# Altium PCB PCB_RB2_My — копия.PcbDoc (part 2 of 3)
Units mm, origin at the board's own origin, x right, y up, seen from the top; angles counter-clockwise.
Board outline 198 x 170 mm, 2 copper layers (Top, Bottom); 107 components, 89 nets, 429 pads, 3906 vias.
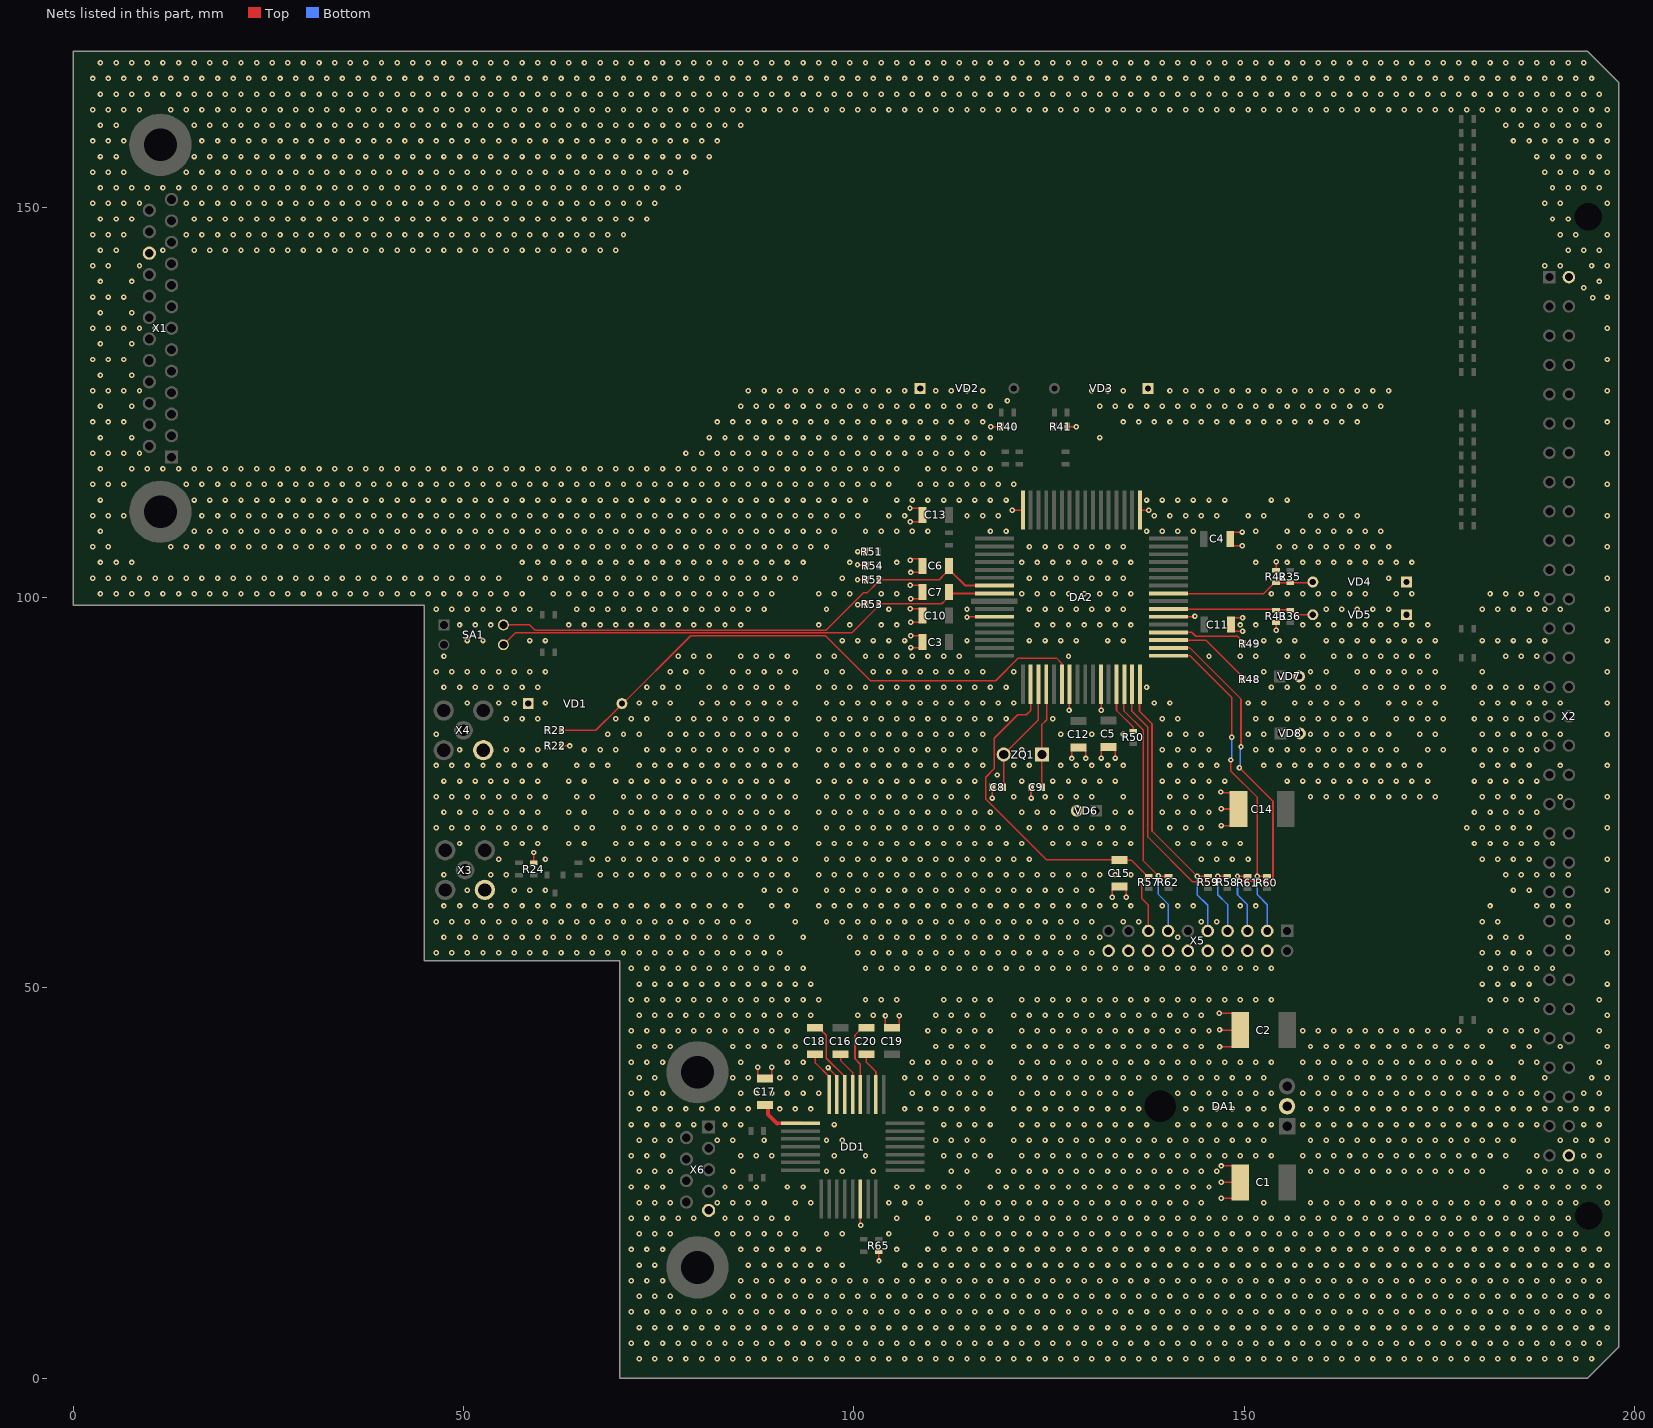
[diagram p2: the nets of this part, all layers, seen from the top]

## Via types
v1: diameter 0.7, hole 0.3, Top to Bottom, tented both sides, 3906 vias

## Nets (pads, with @x,y where several pads share a name; then routed paths per layer and width w, separated by ;. In a path a pad name is that pad's centre, name@x,y a point inside that pad or via, vN(x,y) a via of type N, cw(c..) or ccw(c..) an arc to the next point about the centre after c; other vN are vias at no path point) (continued)
GND: C1.2 C2.2 C3.2 C4.2 C5.2 C6.1 C7.1 C8.2 C9.2 C10.2 C11.2 C12.2 C13.2 C14.2 C15.2 C17.1 C19.1 DA1.2 DA2.3 DA2.15 DA2.19 DA2.30 DA2.41 DA2.56 DD1.2 DD1.15 R22.1 R24.1 R40.2 R41.2 R42.2 R43.2 R51.1 R52.1 R53.1 R54.2 R65.1 VD1.1 VD2.1 VD3.1 VD4.1 VD5.1 VD6.2 VD7.2 VD8.2 X1.23 X2.1B X2.31B X3.2 X4.2 X5.4 X5.6 X5.8 X5.10 X5.12 X5.14 X5.16 X5.18 X5.20 X6.5 | length 121.2
  Top w0.2: R24.1@59,66.025 v1(59,67.35) ; R22.1@62.525,81 v1(63.625,81) ; v1(87.7,39.825) 87.7,38.737 88.138,38.3 89.038,38.3 89.475,38.737 v1(89.475,39.85) ; v1(96.7,39.8) 96.7,39.765 97.84,38.625 DD1.2@97.84,36.35 ; v1(100.475,102.3) R52.1@101.6,102.3 ; v1(100.475,104.2) 100.494,104.181 101.281,104.181 101.3,104.2 ; v1(100.5,105.9) R51.1@101.5,105.9 ; v1(100.507,99.093) 101.518,99.093 R53.1@101.575,99.15 ; DD1.15@100.84,22.97 100.84,19.66 v1(100.9,19.6) ; R65.1@103.2,16.2 103.2,15.05 v1(103.225,15.025) ; v1(104.05,46.425) 104.05,45.337 104.487,44.9 C19.1@104.9,44.9 105.388,44.9 105.825,45.337 v1(105.825,46.45) ; v1(107.2,111.45) 108.35,111.45 108.75,111.05 108.75,110.125 108.35,109.725 v1(107.225,109.725) ; v1(107.25,98.575) 108.4,98.575 108.8,98.175 C10.2@108.8,97.7 108.8,97.25 108.4,96.85 v1(107.275,96.85) ; v1(107.25,101.575) 108.4,101.575 108.8,101.175 108.8,100.25 108.4,99.85 v1(107.275,99.85) ; v1(107.25,104.775) 107.288,104.775 107.463,104.95 108.4,104.95 108.8,104.55 108.8,103.625 108.4,103.225 v1(107.275,103.225) ; v1(107.3,93.6) 108.4,93.6 108.8,94 C3.2@108.8,94.3 ; v1(107.3,95.125) 108.4,95.125 108.792,94.733 C3.2@108.792,94.308 ; v1(114.5,97.5) 114.55,97.55 DA2.3@118,97.55 ; v1(117.525,121.9) R40.2@118.875,121.9 ; v1(117.719,74.328) C8.2@117.719,75.703 ; v1(120.3,111.2) DA2.56@121.65,111.2 ; C9.2@122.7,75.7 122.7,74.35 v1(122.725,74.325) ; R41.2@127.186,121.9 v1(128.5,121.9) ; v1(127.575,85.575) 127.6,85.6 DA2.15@127.6,88.9 ; v1(127.925,79.4) 127.925,80.4 128.325,80.8 129.3,80.8 129.7,80.4 v1(129.7,79.4) ; v1(131.675,85.55) DA2.19@131.675,88.825 ; v1(131.7,79.45) 131.7,80.45 132.1,80.85 C5.2@132.6,80.85 133.075,80.85 133.475,80.45 v1(133.475,79.45) ; v1(133.125,61.6) 133.125,62.6 133.525,63 134.5,63 134.9,62.6 v1(134.9,61.6) ; DA2.41@136.65,111.2 v1(137.8,111.2) ; DA2.30@140.3,97.55 143.65,97.55 v1(143.7,97.6) ; v1(146.825,46.775) 146.85,46.75 148.45,46.75 149.475,45.725 C2.2@149.475,44.6 ; v1(146.85,42.475) 148.45,42.475 149.475,43.5 C2.2@149.475,44.6 ; v1(146.85,44.625) 146.875,44.6 C2.2@149.475,44.6 ; v1(147.025,75.1) 147.16,75.1 147.26,75 148.25,75 149.675,73.575 C14.2@149.675,72.925 ; v1(147.05,70.8) 148.65,70.8 149.675,71.825 C14.2@149.675,72.925 ; v1(147.05,72.95) 147.075,72.925 C14.2@149.675,72.925 ; v1(147.075,23.05) 148.6,23.05 149.475,23.925 C1.2@149.475,25.1 ; v1(147.075,25.125) 147.1,25.1 C1.2@149.475,25.1 ; v1(147.075,27.2) 148.45,27.2 149.475,26.175 C1.2@149.475,25.1 ; C11.2@148.225,96.55 148.225,96.1 148.625,95.7 149.775,95.7 v1(149.8,95.675) ; C11.2@148.225,97.15 148.5,97.425 v1(149.8,97.425) ; v1(149.75,106.65) 148.625,106.65 148.225,107.05 C4.2@148.225,107.525 148.225,108 148.625,108.4 v1(149.75,108.4) ; v1(154.1,95.8) R43.2@154.1,96.8 ; R42.2@154.1,103.5 v1(154.1,104.6)
  other v1: 72.5,2.5 74.5,2.5 76.5,2.5 78.5,2.5 80.5,2.5 82.5,2.5 84.5,2.5 86.5,2.5 88.5,2.5 90.5,2.5 92.5,2.5 94.5,2.5 96.5,2.5 98.5,2.5 100.5,2.5 102.5,2.5 104.5,2.5 106.5,2.5 108.5,2.5 110.5,2.5 112.5,2.5 114.5,2.5 116.5,2.5 118.5,2.5 120.5,2.5 122.5,2.5 124.5,2.5 126.5,2.5 128.5,2.5 130.5,2.5 132.5,2.5 134.5,2.5 136.5,2.5 138.5,2.5 140.5,2.5 142.5,2.5 144.5,2.5 146.5,2.5 148.5,2.5 150.5,2.5 152.5,2.5 154.5,2.5 156.5,2.5 158.5,2.5 160.5,2.5 162.5,2.5 164.5,2.5 166.5,2.5 168.5,2.5 170.5,2.5 172.5,2.5 174.5,2.5 176.5,2.5 178.5,2.5 180.5,2.5 182.5,2.5 184.5,2.5 186.5,2.5 188.5,2.5 190.5,2.5 192.5,2.5 194.5,2.5 71.5,4.5 73.5,4.5 75.5,4.5 77.5,4.5 79.5,4.5 81.5,4.5 83.5,4.5 85.5,4.5 87.5,4.5 89.5,4.5 91.5,4.5 93.5,4.5 95.5,4.5 97.5,4.5 99.5,4.5 101.5,4.5 103.5,4.5 105.5,4.5 107.5,4.5 109.5,4.5 111.5,4.5 113.5,4.5 115.5,4.5 117.5,4.5 119.5,4.5 121.5,4.5 123.5,4.5 125.5,4.5 127.5,4.5 129.5,4.5 131.5,4.5 133.5,4.5 135.5,4.5 137.5,4.5 139.5,4.5 141.5,4.5 143.5,4.5 145.5,4.5 147.5,4.5 149.5,4.5 151.5,4.5 153.5,4.5 155.5,4.5 157.5,4.5 159.5,4.5 161.5,4.5 163.5,4.5 165.5,4.5 167.5,4.5 169.5,4.5 171.5,4.5 173.5,4.5 175.5,4.5 177.5,4.5 179.5,4.5 181.5,4.5 183.5,4.5 185.5,4.5 187.5,4.5 189.5,4.5 191.5,4.5 193.5,4.5 195.5,4.5 72.5,6.5 74.5,6.5 76.5,6.5 78.5,6.5 80.5,6.5 82.5,6.5 84.5,6.5 86.5,6.5 88.5,6.5 90.5,6.5 92.5,6.5 94.5,6.5 96.5,6.5 98.5,6.5 100.5,6.5 102.5,6.5 104.5,6.5 106.5,6.5 108.5,6.5 110.5,6.5 112.5,6.5 114.5,6.5 116.5,6.5 118.5,6.5 120.5,6.5 122.5,6.5 124.5,6.5 126.5,6.5 128.5,6.5 130.5,6.5 132.5,6.5 134.5,6.5 136.5,6.5 138.5,6.5 140.5,6.5 142.5,6.5 144.5,6.5 146.5,6.5 148.5,6.5 150.5,6.5 152.5,6.5 154.5,6.5 156.5,6.5 158.5,6.5 160.5,6.5 162.5,6.5 164.5,6.5 166.5,6.5 168.5,6.5 170.5,6.5 172.5,6.5 174.5,6.5 176.5,6.5 178.5,6.5 180.5,6.5 182.5,6.5 184.5,6.5 186.5,6.5 188.5,6.5 190.5,6.5 192.5,6.5 194.5,6.5 196.5,6.5 71.5,8.5 73.5,8.5 75.5,8.5 77.5,8.5 79.5,8.5 81.5,8.5 83.5,8.5 85.5,8.5 87.5,8.5 89.5,8.5 91.5,8.5 93.5,8.5 95.5,8.5 97.5,8.5 99.5,8.5 101.5,8.5 103.5,8.5 105.5,8.5 107.5,8.5 109.5,8.5 111.5,8.5 113.5,8.5 115.5,8.5 117.5,8.5 119.5,8.5 121.5,8.5 123.5,8.5 125.5,8.5 127.5,8.5 129.5,8.5 131.5,8.5 133.5,8.5 135.5,8.5 137.5,8.5 139.5,8.5 141.5,8.5 143.5,8.5 145.5,8.5 147.5,8.5 149.5,8.5 151.5,8.5 153.5,8.5 155.5,8.5 157.5,8.5 159.5,8.5 161.5,8.5 163.5,8.5 165.5,8.5 167.5,8.5 169.5,8.5 171.5,8.5 173.5,8.5 175.5,8.5 177.5,8.5 179.5,8.5 181.5,8.5 183.5,8.5 185.5,8.5 187.5,8.5 189.5,8.5 191.5,8.5 193.5,8.5 195.5,8.5 72.5,10.5 74.5,10.5 76.5,10.5 84.5,10.5 86.5,10.5 88.5,10.5 90.5,10.5 92.5,10.5 94.5,10.5 96.5,10.5 98.5,10.5 100.5,10.5 102.5,10.5 104.5,10.5 106.5,10.5 108.5,10.5 110.5,10.5 112.5,10.5 114.5,10.5 116.5,10.5 118.5,10.5 120.5,10.5 122.5,10.5 124.5,10.5 126.5,10.5 128.5,10.5 130.5,10.5 132.5,10.5 134.5,10.5 136.5,10.5 138.5,10.5 140.5,10.5 142.5,10.5 144.5,10.5 146.5,10.5 148.5,10.5 150.5,10.5 152.5,10.5 154.5,10.5 156.5,10.5 158.5,10.5 160.5,10.5 162.5,10.5 164.5,10.5 166.5,10.5 168.5,10.5 170.5,10.5 172.5,10.5 174.5,10.5 176.5,10.5 178.5,10.5 180.5,10.5 182.5,10.5 184.5,10.5 186.5,10.5 188.5,10.5 190.5,10.5 192.5,10.5 194.5,10.5 196.5,10.5 71.5,12.5 73.5,12.5 75.5,12.5 85.5,12.5 87.5,12.5 89.5,12.5 91.5,12.5 93.5,12.5 95.5,12.5 97.5,12.5 99.5,12.5 101.5,12.5 103.5,12.5 105.5,12.5 107.5,12.5 109.5,12.5 111.5,12.5 113.5,12.5 115.5,12.5 117.5,12.5 119.5,12.5 121.5,12.5 123.5,12.5 125.5,12.5 127.5,12.5 129.5,12.5 131.5,12.5 133.5,12.5 135.5,12.5 137.5,12.5 139.5,12.5 141.5,12.5 143.5,12.5 145.5,12.5 147.5,12.5 149.5,12.5 151.5,12.5 153.5,12.5 155.5,12.5 157.5,12.5 159.5,12.5 161.5,12.5 163.5,12.5 165.5,12.5 167.5,12.5 169.5,12.5 171.5,12.5 173.5,12.5 175.5,12.5 177.5,12.5 179.5,12.5 181.5,12.5 183.5,12.5 185.5,12.5 187.5,12.5 189.5,12.5 191.5,12.5 193.5,12.5 195.5,12.5 72.5,14.5 74.5,14.5 86.5,14.5 88.5,14.5 90.5,14.5 92.5,14.5 94.5,14.5 96.5,14.5 98.5,14.5 106.5,14.5 108.5,14.5 110.5,14.5 112.5,14.5 114.5,14.5 116.5,14.5 118.5,14.5 120.5,14.5 122.5,14.5 124.5,14.5 126.5,14.5 128.5,14.5 130.5,14.5 132.5,14.5 134.5,14.5 136.5,14.5 138.5,14.5 140.5,14.5 142.5,14.5 144.5,14.5 146.5,14.5 148.5,14.5 150.5,14.5 152.5,14.5 154.5,14.5 156.5,14.5 158.5,14.5 160.5,14.5 162.5,14.5 164.5,14.5 166.5,14.5 168.5,14.5 170.5,14.5 172.5,14.5 174.5,14.5 176.5,14.5 178.5,14.5 180.5,14.5 182.5,14.5 184.5,14.5 186.5,14.5 188.5,14.5 190.5,14.5 192.5,14.5 194.5,14.5 196.5,14.5 71.5,16.5 73.5,16.5 75.5,16.5 85.5,16.5 87.5,16.5 89.5,16.5 91.5,16.5 93.5,16.5 95.5,16.5 105.5,16.5 109.5,16.5 111.5,16.5 113.5,16.5 115.5,16.5 117.5,16.5 119.5,16.5 121.5,16.5 123.5,16.5 125.5,16.5 127.5,16.5 129.5,16.5 131.5,16.5 133.5,16.5 135.5,16.5 137.5,16.5 139.5,16.5 141.5,16.5 143.5,16.5 145.5,16.5 147.5,16.5 149.5,16.5 151.5,16.5 153.5,16.5 155.5,16.5 157.5,16.5 159.5,16.5 161.5,16.5 163.5,16.5 165.5,16.5 167.5,16.5 169.5,16.5 171.5,16.5 173.5,16.5 175.5,16.5 177.5,16.5 179.5,16.5 181.5,16.5 183.5,16.5 185.5,16.5 187.5,16.5 189.5,16.5 191.5,16.5 193.5,16.5 195.5,16.5 72.5,18.5 74.5,18.5 76.5,18.5 82.5,18.5 84.5,18.5 86.5,18.5 88.5,18.5 90.5,18.5 92.5,18.5 96.5,18.5 98.5,18.5 104.5,18.5 110.5,18.5 112.5,18.5 114.5,18.5 116.5,18.5 118.5,18.5 120.5,18.5 122.5,18.5 124.5,18.5 126.5,18.5 128.5,18.5 130.5,18.5 132.5,18.5 134.5,18.5 136.5,18.5 138.5,18.5 140.5,18.5 142.5,18.5 144.5,18.5 146.5,18.5 148.5,18.5 150.5,18.5 152.5,18.5 154.5,18.5 156.5,18.5 158.5,18.5 160.5,18.5 162.5,18.5 164.5,18.5 166.5,18.5 168.5,18.5 170.5,18.5 172.5,18.5 174.5,18.5 176.5,18.5 178.5,18.5 180.5,18.5 182.5,18.5 184.5,18.5 186.5,18.5 188.5,18.5 190.5,18.5 192.5,18.5 196.5,18.5 71.5,20.5 73.5,20.5 75.5,20.5 77.5,20.5 79.5,20.5 83.5,20.5 85.5,20.5 87.5,20.5 89.5,20.5 91.5,20.5 105.5,20.5 109.5,20.5 113.5,20.5 115.5,20.5 117.5,20.5 119.5,20.5 121.5,20.5 123.5,20.5 125.5,20.5 127.5,20.5 129.5,20.5 131.5,20.5 133.5,20.5 135.5,20.5 137.5,20.5 139.5,20.5 141.5,20.5 143.5,20.5 145.5,20.5 147.5,20.5 149.5,20.5 151.5,20.5 153.5,20.5 155.5,20.5 157.5,20.5 159.5,20.5 161.5,20.5 163.5,20.5 165.5,20.5 167.5,20.5 169.5,20.5 171.5,20.5 173.5,20.5 175.5,20.5 177.5,20.5 179.5,20.5 181.5,20.5 183.5,20.5 185.5,20.5 187.5,20.5 189.5,20.5 191.5,20.5 72.5,22.5 74.5,22.5 76.5,22.5 82.5,22.5 84.5,22.5 86.5,22.5 88.5,22.5 92.5,22.5 94.5,22.5 104.5,22.5 106.5,22.5 108.5,22.5 114.5,22.5 116.5,22.5 118.5,22.5 120.5,22.5 122.5,22.5 124.5,22.5 126.5,22.5 128.5,22.5 130.5,22.5 132.5,22.5 134.5,22.5 136.5,22.5 138.5,22.5 140.5,22.5 142.5,22.5 144.5,22.5 152.5,22.5 158.5,22.5 160.5,22.5 162.5,22.5 164.5,22.5 166.5,22.5 168.5,22.5 170.5,22.5 172.5,22.5 174.5,22.5 176.5,22.5 178.5,22.5 180.5,22.5 182.5,22.5 184.5,22.5 186.5,22.5 188.5,22.5 190.5,22.5 192.5,22.5 196.5,22.5 71.5,24.5 73.5,24.5 75.5,24.5 83.5,24.5 85.5,24.5 87.5,24.5 91.5,24.5 93.5,24.5 105.5,24.5 107.5,24.5 109.5,24.5 111.5,24.5 113.5,24.5 117.5,24.5 119.5,24.5 121.5,24.5 123.5,24.5 125.5,24.5 127.5,24.5 129.5,24.5 131.5,24.5 133.5,24.5 135.5,24.5 137.5,24.5 139.5,24.5 141.5,24.5 143.5,24.5 145.5,24.5 183.5,24.5 185.5,24.5 187.5,24.5 189.5,24.5 191.5,24.5 193.5,24.5 195.5,24.5 72.5,26.5 74.5,26.5 76.5,26.5 84.5,26.5 96.5,26.5 98.5,26.5 102.5,26.5 112.5,26.5 114.5,26.5 118.5,26.5 120.5,26.5 122.5,26.5 124.5,26.5 126.5,26.5 128.5,26.5 130.5,26.5 132.5,26.5 134.5,26.5 136.5,26.5 138.5,26.5 140.5,26.5 142.5,26.5 144.5,26.5 146.5,26.5 158.5,26.5 160.5,26.5 162.5,26.5 164.5,26.5 166.5,26.5 168.5,26.5 170.5,26.5 172.5,26.5 174.5,26.5 176.5,26.5 178.5,26.5 180.5,26.5 186.5,26.5 188.5,26.5 190.5,26.5 192.5,26.5 194.5,26.5 196.5,26.5 71.5,28.5 73.5,28.5 75.5,28.5 85.5,28.5 87.5,28.5 89.5,28.5 97.5,28.5 101.5,28.5 111.5,28.5 113.5,28.5 115.5,28.5 117.5,28.5 121.5,28.5 123.5,28.5 125.5,28.5 127.5,28.5 129.5,28.5 131.5,28.5 133.5,28.5 135.5,28.5 137.5,28.5 139.5,28.5 141.5,28.5 143.5,28.5 145.5,28.5 147.5,28.5 149.5,28.5 151.5,28.5 153.5,28.5 157.5,28.5 159.5,28.5 161.5,28.5 163.5,28.5 165.5,28.5 167.5,28.5 169.5,28.5 171.5,28.5 173.5,28.5 175.5,28.5 177.5,28.5 179.5,28.5 181.5,28.5 183.5,28.5 187.5,28.5 193.5,28.5 195.5,28.5 72.5,30.5 74.5,30.5 76.5,30.5 82.5,30.5 84.5,30.5 88.5,30.5 96.5,30.5 98.5,30.5 110.5,30.5 112.5,30.5 114.5,30.5 116.5,30.5 120.5,30.5 122.5,30.5 124.5,30.5 126.5,30.5 128.5,30.5 130.5,30.5 132.5,30.5 134.5,30.5 136.5,30.5 138.5,30.5 140.5,30.5 142.5,30.5 144.5,30.5 146.5,30.5 148.5,30.5 150.5,30.5 152.5,30.5 158.5,30.5 160.5,30.5 162.5,30.5 164.5,30.5 166.5,30.5 168.5,30.5 170.5,30.5 172.5,30.5 174.5,30.5 176.5,30.5 178.5,30.5 180.5,30.5 182.5,30.5 184.5,30.5 190.5,30.5 192.5,30.5 194.5,30.5 196.5,30.5 71.5,32.5 73.5,32.5 75.5,32.5 77.5,32.5 79.5,32.5 83.5,32.5 85.5,32.5 97.5,32.5 111.5,32.5 113.5,32.5 115.5,32.5 117.5,32.5 121.5,32.5 123.5,32.5 125.5,32.5 127.5,32.5 129.5,32.5 131.5,32.5 133.5,32.5 135.5,32.5 137.5,32.5 141.5,32.5 143.5,32.5 145.5,32.5 147.5,32.5 149.5,32.5 151.5,32.5 153.5,32.5 157.5,32.5 159.5,32.5 161.5,32.5 163.5,32.5 165.5,32.5 167.5,32.5 169.5,32.5 171.5,32.5 173.5,32.5 175.5,32.5 177.5,32.5 179.5,32.5 181.5,32.5 183.5,32.5 185.5,32.5 187.5,32.5 193.5,32.5 195.5,32.5 72.5,34.5 74.5,34.5 76.5,34.5 78.5,34.5 80.5,34.5 82.5,34.5 84.5,34.5 86.5,34.5 90.5,34.5 92.5,34.5 94.5,34.5 106.5,34.5 108.5,34.5 110.5,34.5 112.5,34.5 114.5,34.5 116.5,34.5 120.5,34.5 122.5,34.5 124.5,34.5 126.5,34.5 128.5,34.5 130.5,34.5 132.5,34.5 134.5,34.5 136.5,34.5 142.5,34.5 144.5,34.5 146.5,34.5 148.5,34.5 150.5,34.5 152.5,34.5 158.5,34.5 160.5,34.5 162.5,34.5 164.5,34.5 166.5,34.5 168.5,34.5 170.5,34.5 172.5,34.5 174.5,34.5 176.5,34.5 178.5,34.5 180.5,34.5 182.5,34.5 184.5,34.5 186.5,34.5 188.5,34.5 190.5,34.5 192.5,34.5 194.5,34.5 196.5,34.5 71.5,36.5 73.5,36.5 75.5,36.5 85.5,36.5 87.5,36.5 89.5,36.5 91.5,36.5 93.5,36.5 95.5,36.5 107.5,36.5 109.5,36.5 111.5,36.5 113.5,36.5 115.5,36.5 117.5,36.5 121.5,36.5 123.5,36.5 125.5,36.5 127.5,36.5 129.5,36.5 131.5,36.5 133.5,36.5 135.5,36.5 141.5,36.5 143.5,36.5 145.5,36.5 147.5,36.5 149.5,36.5 151.5,36.5 153.5,36.5 157.5,36.5 159.5,36.5 161.5,36.5 163.5,36.5 165.5,36.5 167.5,36.5 169.5,36.5 171.5,36.5 173.5,36.5 175.5,36.5 177.5,36.5 179.5,36.5 181.5,36.5 183.5,36.5 185.5,36.5 187.5,36.5 193.5,36.5 195.5,36.5 72.5,38.5 74.5,38.5 84.5,38.5 86.5,38.5 90.5,38.5 92.5,38.5 94.5,38.5 106.5,38.5 108.5,38.5 110.5,38.5 112.5,38.5 114.5,38.5 116.5,38.5 120.5,38.5 122.5,38.5 124.5,38.5 126.5,38.5 128.5,38.5 130.5,38.5 132.5,38.5 134.5,38.5 136.5,38.5 138.5,38.5 140.5,38.5 142.5,38.5 144.5,38.5 146.5,38.5 148.5,38.5 150.5,38.5 152.5,38.5 158.5,38.5 160.5,38.5 162.5,38.5 164.5,38.5 166.5,38.5 168.5,38.5 170.5,38.5 172.5,38.5 174.5,38.5 176.5,38.5 178.5,38.5 180.5,38.5 182.5,38.5 184.5,38.5 188.5,38.5 194.5,38.5 196.5,38.5 71.5,40.5 73.5,40.5 75.5,40.5 85.5,40.5 91.5,40.5 93.5,40.5 107.5,40.5 109.5,40.5 111.5,40.5 113.5,40.5 115.5,40.5 117.5,40.5 121.5,40.5 123.5,40.5 125.5,40.5 127.5,40.5 129.5,40.5 131.5,40.5 133.5,40.5 135.5,40.5 137.5,40.5 139.5,40.5 141.5,40.5 143.5,40.5 145.5,40.5 147.5,40.5 149.5,40.5 151.5,40.5 153.5,40.5 157.5,40.5 159.5,40.5 161.5,40.5 163.5,40.5 165.5,40.5 167.5,40.5 169.5,40.5 171.5,40.5 173.5,40.5 175.5,40.5 177.5,40.5 179.5,40.5 181.5,40.5 185.5,40.5 187.5,40.5 195.5,40.5 72.5,42.5 74.5,42.5 76.5,42.5 84.5,42.5 86.5,42.5 88.5,42.5 90.5,42.5 92.5,42.5 110.5,42.5 112.5,42.5 114.5,42.5 116.5,42.5 120.5,42.5 122.5,42.5 124.5,42.5 126.5,42.5 128.5,42.5 130.5,42.5 132.5,42.5 134.5,42.5 136.5,42.5 138.5,42.5 140.5,42.5 142.5,42.5 144.5,42.5 158.5,42.5 160.5,42.5 162.5,42.5 164.5,42.5 166.5,42.5 168.5,42.5 170.5,42.5 172.5,42.5 174.5,42.5 176.5,42.5 178.5,42.5 180.5,42.5 184.5,42.5 186.5,42.5 190.5,42.5 196.5,42.5 71.5,44.5 73.5,44.5 75.5,44.5 77.5,44.5 79.5,44.5 81.5,44.5 83.5,44.5 85.5,44.5 87.5,44.5 89.5,44.5 91.5,44.5 109.5,44.5 111.5,44.5 113.5,44.5 115.5,44.5 117.5,44.5 121.5,44.5 123.5,44.5 125.5,44.5 127.5,44.5 129.5,44.5 131.5,44.5 133.5,44.5 135.5,44.5 137.5,44.5 139.5,44.5 141.5,44.5 143.5,44.5 145.5,44.5 157.5,44.5 159.5,44.5 161.5,44.5 163.5,44.5 165.5,44.5 167.5,44.5 169.5,44.5 171.5,44.5 173.5,44.5 175.5,44.5 177.5,44.5 181.5,44.5 183.5,44.5 185.5,44.5 187.5,44.5 195.5,44.5 72.5,46.5 74.5,46.5 76.5,46.5 78.5,46.5 80.5,46.5 82.5,46.5 84.5,46.5 86.5,46.5 88.5,46.5 90.5,46.5 92.5,46.5 94.5,46.5 100.5,46.5 102.5,46.5 110.5,46.5 112.5,46.5 114.5,46.5 116.5,46.5 120.5,46.5 122.5,46.5 124.5,46.5 126.5,46.5 128.5,46.5 130.5,46.5 132.5,46.5 134.5,46.5 136.5,46.5 138.5,46.5 140.5,46.5 142.5,46.5 144.5,46.5 196.5,46.5 71.5,48.5 73.5,48.5 75.5,48.5 77.5,48.5 79.5,48.5 81.5,48.5 83.5,48.5 85.5,48.5 87.5,48.5 89.5,48.5 91.5,48.5 93.5,48.5 95.5,48.5 101.5,48.5 103.5,48.5 105.5,48.5 111.5,48.5 113.5,48.5 115.5,48.5 117.5,48.5 121.5,48.5 123.5,48.5 125.5,48.5 127.5,48.5 129.5,48.5 131.5,48.5 133.5,48.5 135.5,48.5 137.5,48.5 139.5,48.5 141.5,48.5 143.5,48.5 145.5,48.5 147.5,48.5 149.5,48.5 151.5,48.5 153.5,48.5 181.5,48.5 183.5,48.5 185.5,48.5 187.5,48.5 195.5,48.5 72.5,50.5 74.5,50.5 76.5,50.5 78.5,50.5 80.5,50.5 82.5,50.5 84.5,50.5 86.5,50.5 88.5,50.5 90.5,50.5 92.5,50.5 94.5,50.5 180.5,50.5 182.5,50.5 184.5,50.5 186.5,50.5 196.5,50.5 71.5,52.5 73.5,52.5 75.5,52.5 77.5,52.5 79.5,52.5 81.5,52.5 83.5,52.5 85.5,52.5 87.5,52.5 89.5,52.5 91.5,52.5 93.5,52.5 101.5,52.5 103.5,52.5 105.5,52.5 107.5,52.5 109.5,52.5 111.5,52.5 113.5,52.5 115.5,52.5 117.5,52.5 119.5,52.5 121.5,52.5 123.5,52.5 125.5,52.5 127.5,52.5 129.5,52.5 131.5,52.5 133.5,52.5 135.5,52.5 137.5,52.5 139.5,52.5 141.5,52.5 143.5,52.5 145.5,52.5 147.5,52.5 149.5,52.5 151.5,52.5 153.5,52.5 181.5,52.5 183.5,52.5 185.5,52.5 187.5,52.5 189.5,52.5 46.5,54.5 48.5,54.5 50.5,54.5 52.5,54.5 54.5,54.5 56.5,54.5 58.5,54.5 60.5,54.5 62.5,54.5 64.5,54.5 66.5,54.5 68.5,54.5 70.5,54.5 72.5,54.5 74.5,54.5 76.5,54.5 78.5,54.5 80.5,54.5 82.5,54.5 84.5,54.5 86.5,54.5 88.5,54.5 90.5,54.5 100.5,54.5 102.5,54.5 104.5,54.5 106.5,54.5 108.5,54.5 110.5,54.5 112.5,54.5 114.5,54.5 116.5,54.5 118.5,54.5 120.5,54.5 122.5,54.5 124.5,54.5 126.5,54.5 128.5,54.5 130.5,54.5 180.5,54.5 182.5,54.5 184.5,54.5 186.5,54.5 196.5,54.5 47.5,56.5 49.5,56.5 51.5,56.5 53.5,56.5 55.5,56.5 57.5,56.5 59.5,56.5 61.5,56.5 63.5,56.5 65.5,56.5 67.5,56.5 69.5,56.5 71.5,56.5 73.5,56.5 75.5,56.5 77.5,56.5 79.5,56.5 81.5,56.5 83.5,56.5 85.5,56.5 87.5,56.5 89.5,56.5 93.5,56.5 99.5,56.5 101.5,56.5 103.5,56.5 105.5,56.5 107.5,56.5 109.5,56.5 111.5,56.5 113.5,56.5 115.5,56.5 117.5,56.5 119.5,56.5 121.5,56.5 123.5,56.5 125.5,56.5 127.5,56.5 129.5,56.5 131.5,56.5 141.5,56.5 181.5,56.5 183.5,56.5 185.5,56.5 191.5,56.5 46.5,58.5 48.5,58.5 50.5,58.5 52.5,58.5 54.5,58.5 56.5,58.5 58.5,58.5 60.5,58.5 62.5,58.5 64.5,58.5 66.5,58.5 68.5,58.5 70.5,58.5 72.5,58.5 74.5,58.5 76.5,58.5 78.5,58.5 80.5,58.5 82.5,58.5 84.5,58.5 86.5,58.5 92.5,58.5 96.5,58.5 98.5,58.5 100.5,58.5 102.5,58.5 104.5,58.5 106.5,58.5 108.5,58.5 110.5,58.5 112.5,58.5 114.5,58.5 116.5,58.5 118.5,58.5 120.5,58.5 122.5,58.5 124.5,58.5 126.5,58.5 128.5,58.5 130.5,58.5 134.5,58.5 136.5,58.5 144.5,58.5 146.5,58.5 180.5,58.5 182.5,58.5 196.5,58.5 47.5,60.5 49.5,60.5 51.5,60.5 53.5,60.5 55.5,60.5 57.5,60.5 59.5,60.5 61.5,60.5 63.5,60.5 65.5,60.5 67.5,60.5 69.5,60.5 71.5,60.5 73.5,60.5 75.5,60.5 77.5,60.5 79.5,60.5 81.5,60.5 83.5,60.5 85.5,60.5 89.5,60.5 91.5,60.5 95.5,60.5 97.5,60.5 99.5,60.5 101.5,60.5 103.5,60.5 105.5,60.5 107.5,60.5 109.5,60.5 111.5,60.5 113.5,60.5 115.5,60.5 117.5,60.5 119.5,60.5 121.5,60.5 123.5,60.5 125.5,60.5 127.5,60.5 129.5,60.5 131.5,60.5 133.5,60.5 135.5,60.5 139.5,60.5 141.5,60.5 143.5,60.5 149.5,60.5 151.5,60.5 181.5,60.5 187.5,60.5 189.5,60.5 191.5,60.5 50.5,62.5 56.5,62.5 58.5,62.5 60.5,62.5 88.5,62.5 90.5,62.5 92.5,62.5 96.5,62.5 98.5,62.5 100.5,62.5 102.5,62.5 104.5,62.5 106.5,62.5 108.5,62.5 110.5,62.5 112.5,62.5 114.5,62.5 116.5,62.5 118.5,62.5 120.5,62.5 122.5,62.5 124.5,62.5 126.5,62.5 128.5,62.5 130.5,62.5 184.5,62.5 186.5,62.5 196.5,62.5 47.5,64.5 53.5,64.5 55.5,64.5 67.5,64.5 69.5,64.5 71.5,64.5 73.5,64.5 75.5,64.5 77.5,64.5 79.5,64.5 81.5,64.5 83.5,64.5 85.5,64.5 87.5,64.5 89.5,64.5 91.5,64.5 95.5,64.5 97.5,64.5 99.5,64.5 101.5,64.5 103.5,64.5 105.5,64.5 107.5,64.5 109.5,64.5 111.5,64.5 113.5,64.5 115.5,64.5 117.5,64.5 119.5,64.5 121.5,64.5 123.5,64.5 125.5,64.5 127.5,64.5 129.5,64.5 131.5,64.5 133.5,64.5 135.5,64.5 183.5,64.5 185.5,64.5 187.5,64.5 189.5,64.5 191.5,64.5 54.5,66.5 60.5,66.5 66.5,66.5 68.5,66.5 70.5,66.5 72.5,66.5 74.5,66.5 76.5,66.5 78.5,66.5 80.5,66.5 82.5,66.5 84.5,66.5 86.5,66.5 88.5,66.5 90.5,66.5 92.5,66.5 96.5,66.5 98.5,66.5 100.5,66.5 102.5,66.5 104.5,66.5 106.5,66.5 108.5,66.5 110.5,66.5 112.5,66.5 114.5,66.5 116.5,66.5 118.5,66.5 120.5,66.5 122.5,66.5 144.5,66.5 146.5,66.5 148.5,66.5 150.5,66.5 180.5,66.5 182.5,66.5 184.5,66.5 186.5,66.5 196.5,66.5 49.5,68.5 55.5,68.5 57.5,68.5 59.5,68.5 63.5,68.5 65.5,68.5 69.5,68.5 71.5,68.5 73.5,68.5 75.5,68.5 77.5,68.5 79.5,68.5 81.5,68.5 83.5,68.5 85.5,68.5 87.5,68.5 89.5,68.5 91.5,68.5 95.5,68.5 97.5,68.5 99.5,68.5 101.5,68.5 103.5,68.5 105.5,68.5 107.5,68.5 109.5,68.5 111.5,68.5 113.5,68.5 115.5,68.5 117.5,68.5 119.5,68.5 121.5,68.5 125.5,68.5 127.5,68.5 129.5,68.5 131.5,68.5 133.5,68.5 135.5,68.5 141.5,68.5 143.5,68.5 145.5,68.5 147.5,68.5 149.5,68.5 179.5,68.5 181.5,68.5 183.5,68.5 185.5,68.5 187.5,68.5 189.5,68.5 46.5,70.5 48.5,70.5 50.5,70.5 52.5,70.5 54.5,70.5 56.5,70.5 58.5,70.5 60.5,70.5 64.5,70.5 66.5,70.5 70.5,70.5 72.5,70.5 74.5,70.5 76.5,70.5 78.5,70.5 80.5,70.5 82.5,70.5 84.5,70.5 86.5,70.5 88.5,70.5 90.5,70.5 92.5,70.5 96.5,70.5 98.5,70.5 100.5,70.5 102.5,70.5 104.5,70.5 106.5,70.5 108.5,70.5 110.5,70.5 112.5,70.5 114.5,70.5 116.5,70.5 118.5,70.5 122.5,70.5 124.5,70.5 126.5,70.5 128.5,70.5 130.5,70.5 132.5,70.5 134.5,70.5 140.5,70.5 142.5,70.5 144.5,70.5 178.5,70.5 180.5,70.5 182.5,70.5 184.5,70.5 186.5,70.5 196.5,70.5 47.5,72.5 49.5,72.5 51.5,72.5 53.5,72.5 55.5,72.5 57.5,72.5 59.5,72.5 63.5,72.5 65.5,72.5 69.5,72.5 71.5,72.5 73.5,72.5 75.5,72.5 77.5,72.5 79.5,72.5 81.5,72.5 83.5,72.5 85.5,72.5 87.5,72.5 89.5,72.5 91.5,72.5 95.5,72.5 97.5,72.5 99.5,72.5 101.5,72.5 103.5,72.5 105.5,72.5 107.5,72.5 109.5,72.5 111.5,72.5 113.5,72.5 115.5,72.5 117.5,72.5 121.5,72.5 123.5,72.5 125.5,72.5 133.5,72.5 135.5,72.5 139.5,72.5 141.5,72.5 143.5,72.5 145.5,72.5 179.5,72.5 181.5,72.5 183.5,72.5 185.5,72.5 187.5,72.5 46.5,74.5 48.5,74.5 50.5,74.5 52.5,74.5 54.5,74.5 56.5,74.5 58.5,74.5 60.5,74.5 64.5,74.5 66.5,74.5 70.5,74.5 72.5,74.5 74.5,74.5 76.5,74.5 78.5,74.5 80.5,74.5 82.5,74.5 84.5,74.5 86.5,74.5 88.5,74.5 90.5,74.5 92.5,74.5 96.5,74.5 98.5,74.5 100.5,74.5 102.5,74.5 104.5,74.5 106.5,74.5 108.5,74.5 110.5,74.5 112.5,74.5 114.5,74.5 120.5,74.5 124.5,74.5 126.5,74.5 128.5,74.5 130.5,74.5 134.5,74.5 140.5,74.5 142.5,74.5 144.5,74.5 158.5,74.5 160.5,74.5 162.5,74.5 164.5,74.5 166.5,74.5 168.5,74.5 170.5,74.5 172.5,74.5 174.5,74.5 180.5,74.5 182.5,74.5 184.5,74.5 186.5,74.5 190.5,74.5 196.5,74.5 47.5,76.5 49.5,76.5 51.5,76.5 53.5,76.5 55.5,76.5 57.5,76.5 59.5,76.5 63.5,76.5 65.5,76.5 69.5,76.5 71.5,76.5 73.5,76.5 75.5,76.5 77.5,76.5 79.5,76.5 81.5,76.5 83.5,76.5 85.5,76.5 87.5,76.5 89.5,76.5 91.5,76.5 95.5,76.5 97.5,76.5 99.5,76.5 101.5,76.5 103.5,76.5 105.5,76.5 107.5,76.5 109.5,76.5 111.5,76.5 113.5,76.5 115.5,76.5 121.5,76.5 125.5,76.5 127.5,76.5 129.5,76.5 131.5,76.5 133.5,76.5 139.5,76.5 141.5,76.5 143.5,76.5 145.5,76.5 147.5,76.5 155.5,76.5 157.5,76.5 159.5,76.5 161.5,76.5 163.5,76.5 165.5,76.5 167.5,76.5 169.5,76.5 171.5,76.5 173.5,76.5 179.5,76.5 181.5,76.5 183.5,76.5 185.5,76.5 187.5,76.5 118.356,77.277 46.5,78.5 48.5,78.5 50.5,78.5 52.5,78.5 54.5,78.5 56.5,78.5 58.5,78.5 60.5,78.5 64.5,78.5 66.5,78.5 68.5,78.5 72.5,78.5 74.5,78.5 76.5,78.5 78.5,78.5 80.5,78.5 82.5,78.5 84.5,78.5 86.5,78.5 88.5,78.5 90.5,78.5 92.5,78.5 96.5,78.5 98.5,78.5 100.5,78.5 102.5,78.5 104.5,78.5 106.5,78.5 108.5,78.5 110.5,78.5 112.5,78.5 114.5,78.5 116.5,78.5 120.5,78.5 122.5,78.5 126.5,78.5 128.5,78.5 130.5,78.5 132.5,78.5 134.5,78.5 140.5,78.5 142.5,78.5 144.5,78.5 146.5,78.5 152.5,78.5 154.5,78.5 156.5,78.5 158.5,78.5 160.5,78.5 162.5,78.5 164.5,78.5 166.5,78.5 168.5,78.5 170.5,78.5 172.5,78.5 180.5,78.5 182.5,78.5 184.5,78.5 186.5,78.5 190.5,78.5 196.5,78.5 49.5,80.5 55.5,80.5 57.5,80.5 59.5,80.5 65.5,80.5 67.5,80.5 69.5,80.5 73.5,80.5 75.5,80.5 77.5,80.5 79.5,80.5 81.5,80.5 83.5,80.5 85.5,80.5 87.5,80.5 89.5,80.5 91.5,80.5 95.5,80.5 97.5,80.5 99.5,80.5 101.5,80.5 103.5,80.5 105.5,80.5 107.5,80.5 109.5,80.5 111.5,80.5 113.5,80.5 115.5,80.5 121.5,80.5 139.5,80.5 141.5,80.5 143.5,80.5 145.5,80.5 151.5,80.5 153.5,80.5 155.5,80.5 157.5,80.5 159.5,80.5 161.5,80.5 163.5,80.5 165.5,80.5 167.5,80.5 169.5,80.5 173.5,80.5 175.5,80.5 179.5,80.5 181.5,80.5 183.5,80.5 185.5,80.5 187.5,80.5 46.5,82.5 68.5,82.5 70.5,82.5 72.5,82.5 76.5,82.5 78.5,82.5 80.5,82.5 82.5,82.5 84.5,82.5 86.5,82.5 88.5,82.5 90.5,82.5 92.5,82.5 96.5,82.5 98.5,82.5 100.5,82.5 102.5,82.5 104.5,82.5 106.5,82.5 108.5,82.5 110.5,82.5 112.5,82.5 114.5,82.5 116.5,82.5 126.5,82.5 130.5,82.5 134.5,82.5 140.5,82.5 142.5,82.5 144.5,82.5 150.5,82.5 152.5,82.5 158.5,82.5 160.5,82.5 162.5,82.5 164.5,82.5 166.5,82.5 168.5,82.5 172.5,82.5 174.5,82.5 180.5,82.5 182.5,82.5 184.5,82.5 186.5,82.5 188.5,82.5 190.5,82.5 196.5,82.5 55.5,84.5 57.5,84.5 59.5,84.5 69.5,84.5 71.5,84.5 73.5,84.5 77.5,84.5 79.5,84.5 81.5,84.5 83.5,84.5 85.5,84.5 87.5,84.5 89.5,84.5 91.5,84.5 95.5,84.5 97.5,84.5 99.5,84.5 101.5,84.5 103.5,84.5 105.5,84.5 107.5,84.5 109.5,84.5 111.5,84.5 113.5,84.5 115.5,84.5 117.5,84.5 119.5,84.5 125.5,84.5 139.5,84.5 141.5,84.5 151.5,84.5 153.5,84.5 155.5,84.5 157.5,84.5 159.5,84.5 161.5,84.5 163.5,84.5 165.5,84.5 169.5,84.5 171.5,84.5 173.5,84.5 175.5,84.5 179.5,84.5 181.5,84.5 183.5,84.5 185.5,84.5 187.5,84.5 50.5,86.5 54.5,86.5 56.5,86.5 60.5,86.5 72.5,86.5 74.5,86.5 76.5,86.5 80.5,86.5 82.5,86.5 84.5,86.5 86.5,86.5 88.5,86.5 90.5,86.5 92.5,86.5 96.5,86.5 98.5,86.5 100.5,86.5 102.5,86.5 104.5,86.5 106.5,86.5 108.5,86.5 110.5,86.5 112.5,86.5 114.5,86.5 116.5,86.5 118.5,86.5 120.5,86.5 138.5,86.5 140.5,86.5 150.5,86.5 152.5,86.5 156.5,86.5 158.5,86.5 160.5,86.5 162.5,86.5 164.5,86.5 168.5,86.5 170.5,86.5 172.5,86.5 174.5,86.5 180.5,86.5 182.5,86.5 184.5,86.5 186.5,86.5 188.5,86.5 190.5,86.5 196.5,86.5 47.5,88.5 49.5,88.5 51.5,88.5 53.5,88.5 55.5,88.5 57.5,88.5 59.5,88.5 73.5,88.5 75.5,88.5 77.5,88.5 81.5,88.5 83.5,88.5 85.5,88.5 87.5,88.5 89.5,88.5 91.5,88.5 95.5,88.5 97.5,88.5 99.5,88.5 101.5,88.5 103.5,88.5 105.5,88.5 107.5,88.5 109.5,88.5 111.5,88.5 113.5,88.5 115.5,88.5 117.5,88.5 119.5,88.5 137.5,88.5 153.5,88.5 155.5,88.5 157.5,88.5 159.5,88.5 161.5,88.5 165.5,88.5 167.5,88.5 169.5,88.5 171.5,88.5 173.5,88.5 175.5,88.5 179.5,88.5 181.5,88.5 183.5,88.5 185.5,88.5 187.5,88.5 46.5,90.5 48.5,90.5 50.5,90.5 52.5,90.5 54.5,90.5 56.5,90.5 58.5,90.5 60.5,90.5 76.5,90.5 78.5,90.5 80.5,90.5 84.5,90.5 86.5,90.5 88.5,90.5 90.5,90.5 92.5,90.5 96.5,90.5 98.5,90.5 102.5,90.5 104.5,90.5 106.5,90.5 108.5,90.5 110.5,90.5 112.5,90.5 114.5,90.5 116.5,90.5 120.5,90.5 152.5,90.5 158.5,90.5 160.5,90.5 164.5,90.5 166.5,90.5 168.5,90.5 170.5,90.5 172.5,90.5 174.5,90.5 180.5,90.5 196.5,90.5 47.5,92.5 77.5,92.5 79.5,92.5 81.5,92.5 85.5,92.5 87.5,92.5 89.5,92.5 91.5,92.5 95.5,92.5 97.5,92.5 101.5,92.5 103.5,92.5 105.5,92.5 107.5,92.5 109.5,92.5 111.5,92.5 113.5,92.5 127.5,92.5 145.5,92.5 149.5,92.5 151.5,92.5 155.5,92.5 157.5,92.5 161.5,92.5 163.5,92.5 165.5,92.5 167.5,92.5 169.5,92.5 171.5,92.5 173.5,92.5 183.5,92.5 185.5,92.5 187.5,92.5 50.5,94.5 52.5,94.5 58.5,94.5 60.5,94.5 98.5,94.5 100.5,94.5 102.5,94.5 104.5,94.5 106.5,94.5 114.5,94.5 122.5,94.5 124.5,94.5 126.5,94.5 128.5,94.5 132.5,94.5 134.5,94.5 152.5,94.5 154.5,94.5 156.5,94.5 160.5,94.5 162.5,94.5 164.5,94.5 166.5,94.5 168.5,94.5 170.5,94.5 172.5,94.5 174.5,94.5 180.5,94.5 182.5,94.5 184.5,94.5 186.5,94.5 188.5,94.5 196.5,94.5 49.5,96.5 51.5,96.5 53.5,96.5 63.5,96.5 65.5,96.5 67.5,96.5 69.5,96.5 71.5,96.5 73.5,96.5 75.5,96.5 77.5,96.5 79.5,96.5 81.5,96.5 83.5,96.5 85.5,96.5 95.5,96.5 99.5,96.5 103.5,96.5 105.5,96.5 123.5,96.5 125.5,96.5 127.5,96.5 129.5,96.5 131.5,96.5 133.5,96.5 135.5,96.5 149.5,96.5 151.5,96.5 157.5,96.5 159.5,96.5 161.5,96.5 163.5,96.5 165.5,96.5 167.5,96.5 169.5,96.5 171.5,96.5 173.5,96.5 46.5,98.5 48.5,98.5 50.5,98.5 52.5,98.5 54.5,98.5 56.5,98.5 58.5,98.5 64.5,98.5 66.5,98.5 68.5,98.5 70.5,98.5 72.5,98.5 74.5,98.5 76.5,98.5 78.5,98.5 80.5,98.5 82.5,98.5 84.5,98.5 86.5,98.5 88.5,98.5 96.5,98.5 104.5,98.5 114.5,98.5 122.5,98.5 124.5,98.5 126.5,98.5 128.5,98.5 130.5,98.5 132.5,98.5 134.5,98.5 160.5,98.5 162.5,98.5 164.5,98.5 166.5,98.5 168.5,98.5 180.5,98.5 182.5,98.5 184.5,98.5 186.5,98.5 188.5,98.5 190.5,98.5 196.5,98.5 3.5,100.5 5.5,100.5 7.5,100.5 9.5,100.5 11.5,100.5 13.5,100.5 15.5,100.5 17.5,100.5 19.5,100.5 21.5,100.5 23.5,100.5 25.5,100.5 27.5,100.5 29.5,100.5 31.5,100.5 33.5,100.5 35.5,100.5 37.5,100.5 39.5,100.5 41.5,100.5 43.5,100.5 45.5,100.5 47.5,100.5 49.5,100.5 51.5,100.5 53.5,100.5 55.5,100.5 57.5,100.5 61.5,100.5 63.5,100.5 65.5,100.5 67.5,100.5 69.5,100.5 71.5,100.5 73.5,100.5 75.5,100.5 77.5,100.5 79.5,100.5 81.5,100.5 83.5,100.5 85.5,100.5 87.5,100.5 89.5,100.5 95.5,100.5 97.5,100.5 99.5,100.5 103.5,100.5 105.5,100.5 121.5,100.5 123.5,100.5 125.5,100.5 127.5,100.5 129.5,100.5 131.5,100.5 133.5,100.5 135.5,100.5 153.5,100.5 155.5,100.5 157.5,100.5 159.5,100.5 161.5,100.5 163.5,100.5 165.5,100.5 169.5,100.5 171.5,100.5 181.5,100.5 183.5,100.5 185.5,100.5 187.5,100.5 2.5,102.5 4.5,102.5 6.5,102.5 8.5,102.5 10.5,102.5 12.5,102.5 14.5,102.5 16.5,102.5 18.5,102.5 20.5,102.5 22.5,102.5 24.5,102.5 26.5,102.5 28.5,102.5 30.5,102.5 32.5,102.5 34.5,102.5 36.5,102.5 38.5,102.5 40.5,102.5 42.5,102.5 44.5,102.5 46.5,102.5 48.5,102.5 50.5,102.5 52.5,102.5 54.5,102.5 58.5,102.5 60.5,102.5 62.5,102.5 64.5,102.5 66.5,102.5 68.5,102.5 70.5,102.5 72.5,102.5 74.5,102.5 76.5,102.5 78.5,102.5 80.5,102.5 82.5,102.5 84.5,102.5 86.5,102.5 88.5,102.5 90.5,102.5 92.5,102.5 98.5,102.5 122.5,102.5 124.5,102.5 126.5,102.5 128.5,102.5 130.5,102.5 132.5,102.5 134.5,102.5 168.5,102.5 196.5,102.5 3.5,104.5 5.5,104.5 7.5,104.5 57.5,104.5 59.5,104.5 61.5,104.5 63.5,104.5 65.5,104.5 67.5,104.5 69.5,104.5 71.5,104.5 73.5,104.5 75.5,104.5 77.5,104.5 79.5,104.5 81.5,104.5 83.5,104.5 85.5,104.5 87.5,104.5 89.5,104.5 91.5,104.5 93.5,104.5 99.5,104.5 105.5,104.5 121.5,104.5 123.5,104.5 125.5,104.5 127.5,104.5 129.5,104.5 131.5,104.5 133.5,104.5 135.5,104.5 151.5,104.5 155.5,104.5 157.5,104.5 159.5,104.5 161.5,104.5 163.5,104.5 165.5,104.5 167.5,104.5 169.5,104.5 171.5,104.5 2.5,106.5 4.5,106.5 12.5,106.5 14.5,106.5 16.5,106.5 18.5,106.5 20.5,106.5 22.5,106.5 24.5,106.5 26.5,106.5 28.5,106.5 30.5,106.5 32.5,106.5 34.5,106.5 36.5,106.5 38.5,106.5 40.5,106.5 42.5,106.5 44.5,106.5 46.5,106.5 48.5,106.5 50.5,106.5 52.5,106.5 54.5,106.5 56.5,106.5 58.5,106.5 60.5,106.5 62.5,106.5 64.5,106.5 66.5,106.5 68.5,106.5 70.5,106.5 72.5,106.5 74.5,106.5 76.5,106.5 78.5,106.5 80.5,106.5 82.5,106.5 84.5,106.5 86.5,106.5 88.5,106.5 90.5,106.5 92.5,106.5 94.5,106.5 96.5,106.5 122.5,106.5 124.5,106.5 126.5,106.5 128.5,106.5 130.5,106.5 132.5,106.5 134.5,106.5 154.5,106.5 156.5,106.5 158.5,106.5 160.5,106.5 162.5,106.5 164.5,106.5 166.5,106.5 168.5,106.5 196.5,106.5 3.5,108.5 15.5,108.5 17.5,108.5 19.5,108.5 21.5,108.5 23.5,108.5 25.5,108.5 27.5,108.5 29.5,108.5 31.5,108.5 33.5,108.5 35.5,108.5 37.5,108.5 39.5,108.5 41.5,108.5 43.5,108.5 45.5,108.5 47.5,108.5 49.5,108.5 51.5,108.5 53.5,108.5 55.5,108.5 57.5,108.5 59.5,108.5 61.5,108.5 63.5,108.5 65.5,108.5 67.5,108.5 69.5,108.5 71.5,108.5 73.5,108.5 75.5,108.5 77.5,108.5 79.5,108.5 81.5,108.5 83.5,108.5 85.5,108.5 87.5,108.5 89.5,108.5 91.5,108.5 93.5,108.5 95.5,108.5 97.5,108.5 101.5,108.5 103.5,108.5 105.5,108.5 107.5,108.5 109.5,108.5 117.5,108.5 119.5,108.5 137.5,108.5 139.5,108.5 141.5,108.5 143.5,108.5 151.5,108.5 155.5,108.5 157.5,108.5 159.5,108.5 161.5,108.5 163.5,108.5 165.5,108.5 167.5,108.5 2.5,110.5 4.5,110.5 6.5,110.5 16.5,110.5 18.5,110.5 20.5,110.5 22.5,110.5 24.5,110.5 26.5,110.5 28.5,110.5 30.5,110.5 32.5,110.5 34.5,110.5 36.5,110.5 38.5,110.5 40.5,110.5 42.5,110.5 44.5,110.5 46.5,110.5 48.5,110.5 50.5,110.5 52.5,110.5 54.5,110.5 56.5,110.5 58.5,110.5 60.5,110.5 62.5,110.5 64.5,110.5 66.5,110.5 68.5,110.5 70.5,110.5 72.5,110.5 74.5,110.5 76.5,110.5 78.5,110.5 80.5,110.5 82.5,110.5 84.5,110.5 86.5,110.5 88.5,110.5 90.5,110.5 92.5,110.5 94.5,110.5 96.5,110.5 98.5,110.5 100.5,110.5 104.5,110.5 106.5,110.5 114.5,110.5 116.5,110.5 118.5,110.5 138.5,110.5 140.5,110.5 142.5,110.5 144.5,110.5 146.5,110.5 150.5,110.5 152.5,110.5 158.5,110.5 160.5,110.5 162.5,110.5 164.5,110.5 196.5,110.5 3.5,112.5 15.5,112.5 17.5,112.5 19.5,112.5 21.5,112.5 23.5,112.5 25.5,112.5 27.5,112.5 29.5,112.5 31.5,112.5 33.5,112.5 35.5,112.5 37.5,112.5 39.5,112.5 41.5,112.5 43.5,112.5 45.5,112.5 47.5,112.5 49.5,112.5 51.5,112.5 53.5,112.5 55.5,112.5 57.5,112.5 59.5,112.5 61.5,112.5 63.5,112.5 65.5,112.5 67.5,112.5 69.5,112.5 71.5,112.5 73.5,112.5 75.5,112.5 77.5,112.5 79.5,112.5 81.5,112.5 83.5,112.5 85.5,112.5 87.5,112.5 89.5,112.5 91.5,112.5 93.5,112.5 95.5,112.5 97.5,112.5 99.5,112.5 101.5,112.5 105.5,112.5 107.5,112.5 109.5,112.5 111.5,112.5 113.5,112.5 115.5,112.5 117.5,112.5 119.5,112.5 137.5,112.5 139.5,112.5 141.5,112.5 143.5,112.5 145.5,112.5 147.5,112.5 153.5,112.5 155.5,112.5 2.5,114.5 4.5,114.5 6.5,114.5 14.5,114.5 16.5,114.5 18.5,114.5 20.5,114.5 22.5,114.5 24.5,114.5 26.5,114.5 28.5,114.5 30.5,114.5 32.5,114.5 34.5,114.5 36.5,114.5 38.5,114.5 40.5,114.5 42.5,114.5 44.5,114.5 46.5,114.5 48.5,114.5 50.5,114.5 52.5,114.5 54.5,114.5 56.5,114.5 58.5,114.5 60.5,114.5 62.5,114.5 64.5,114.5 66.5,114.5 68.5,114.5 70.5,114.5 72.5,114.5 74.5,114.5 76.5,114.5 78.5,114.5 80.5,114.5 82.5,114.5 84.5,114.5 86.5,114.5 88.5,114.5 90.5,114.5 92.5,114.5 94.5,114.5 96.5,114.5 98.5,114.5 100.5,114.5 102.5,114.5 104.5,114.5 108.5,114.5 110.5,114.5 112.5,114.5 114.5,114.5 116.5,114.5 118.5,114.5 120.5,114.5 196.5,114.5 3.5,116.5 7.5,116.5 9.5,116.5 11.5,116.5 13.5,116.5 15.5,116.5 17.5,116.5 19.5,116.5 21.5,116.5 23.5,116.5 25.5,116.5 27.5,116.5 29.5,116.5 31.5,116.5 33.5,116.5 35.5,116.5 37.5,116.5 39.5,116.5 41.5,116.5 43.5,116.5 45.5,116.5 47.5,116.5 49.5,116.5 51.5,116.5 53.5,116.5 55.5,116.5 57.5,116.5 59.5,116.5 61.5,116.5 63.5,116.5 65.5,116.5 67.5,116.5 69.5,116.5 71.5,116.5 73.5,116.5 75.5,116.5 77.5,116.5 79.5,116.5 81.5,116.5 83.5,116.5 85.5,116.5 87.5,116.5 89.5,116.5 91.5,116.5 93.5,116.5 95.5,116.5 97.5,116.5 99.5,116.5 101.5,116.5 103.5,116.5 105.5,116.5 109.5,116.5 111.5,116.5 113.5,116.5 115.5,116.5 117.5,116.5 2.5,118.5 4.5,118.5 6.5,118.5 8.5,118.5 78.5,118.5 80.5,118.5 82.5,118.5 84.5,118.5 86.5,118.5 88.5,118.5 90.5,118.5 92.5,118.5 94.5,118.5 96.5,118.5 98.5,118.5 100.5,118.5 102.5,118.5 104.5,118.5 106.5,118.5 108.5,118.5 110.5,118.5 112.5,118.5 114.5,118.5 116.5,118.5 196.5,118.5 3.5,120.5 7.5,120.5 81.5,120.5 83.5,120.5 85.5,120.5 87.5,120.5 89.5,120.5 91.5,120.5 93.5,120.5 95.5,120.5 97.5,120.5 99.5,120.5 101.5,120.5 103.5,120.5 105.5,120.5 107.5,120.5 109.5,120.5 111.5,120.5 113.5,120.5 115.5,120.5 117.5,120.5 131.5,120.5 2.5,122.5 4.5,122.5 6.5,122.5 82.5,122.5 84.5,122.5 86.5,122.5 88.5,122.5 90.5,122.5 92.5,122.5 94.5,122.5 96.5,122.5 98.5,122.5 100.5,122.5 102.5,122.5 104.5,122.5 106.5,122.5 108.5,122.5 110.5,122.5 112.5,122.5 114.5,122.5 116.5,122.5 134.5,122.5 136.5,122.5 138.5,122.5 140.5,122.5 142.5,122.5 144.5,122.5 146.5,122.5 148.5,122.5 150.5,122.5 152.5,122.5 154.5,122.5 156.5,122.5 158.5,122.5 160.5,122.5 162.5,122.5 164.5,122.5 196.5,122.5 3.5,124.5 7.5,124.5 85.5,124.5 87.5,124.5 89.5,124.5 91.5,124.5 93.5,124.5 95.5,124.5 97.5,124.5 99.5,124.5 101.5,124.5 103.5,124.5 105.5,124.5 107.5,124.5 109.5,124.5 111.5,124.5 113.5,124.5 115.5,124.5 117.5,124.5 131.5,124.5 133.5,124.5 135.5,124.5 137.5,124.5 139.5,124.5 141.5,124.5 143.5,124.5 145.5,124.5 147.5,124.5 149.5,124.5 151.5,124.5 153.5,124.5 155.5,124.5 157.5,124.5 159.5,124.5 161.5,124.5 163.5,124.5 165.5,124.5 167.5,124.5 119.681,125.219 2.5,126.5 4.5,126.5 6.5,126.5 8.5,126.5 86.5,126.5 88.5,126.5 90.5,126.5 92.5,126.5 94.5,126.5 96.5,126.5 98.5,126.5 100.5,126.5 102.5,126.5 104.5,126.5 106.5,126.5 110.5,126.5 112.5,126.5 114.5,126.5 116.5,126.5 130.5,126.5 132.5,126.5 134.5,126.5 140.5,126.5 142.5,126.5 144.5,126.5 146.5,126.5 148.5,126.5 150.5,126.5 152.5,126.5 154.5,126.5 156.5,126.5 158.5,126.5 160.5,126.5 162.5,126.5 164.5,126.5 166.5,126.5 168.5,126.5 196.5,126.5 3.5,128.5 7.5,128.5 2.5,130.5 4.5,130.5 6.5,130.5 196.5,130.5 3.5,132.5 7.5,132.5 2.5,134.5 4.5,134.5 6.5,134.5 8.5,134.5 10.5,134.5 196.5,134.5 3.5,136.5 7.5,136.5 194.64,138.426 2.5,138.5 4.5,138.5 6.5,138.5 196.5,138.5 193.5,139.7 3.5,140.5 7.5,140.5 195.5,140.5 2.5,142.5 4.5,142.5 8.5,142.5 188.5,142.5 190.5,142.5 194.5,142.5 196.5,142.5 3.5,144.5 5.5,144.5 11.5,144.5 15.5,144.5 17.5,144.5 19.5,144.5 21.5,144.5 23.5,144.5 25.5,144.5 27.5,144.5 29.5,144.5 31.5,144.5 33.5,144.5 35.5,144.5 37.5,144.5 39.5,144.5 41.5,144.5 43.5,144.5 45.5,144.5 47.5,144.5 49.5,144.5 51.5,144.5 53.5,144.5 55.5,144.5 57.5,144.5 59.5,144.5 61.5,144.5 63.5,144.5 65.5,144.5 67.5,144.5 69.5,144.5 191.5,144.5 193.5,144.5 195.5,144.5 2.5,146.5 4.5,146.5 6.5,146.5 14.5,146.5 16.5,146.5 18.5,146.5 20.5,146.5 22.5,146.5 24.5,146.5 26.5,146.5 28.5,146.5 30.5,146.5 32.5,146.5 34.5,146.5 36.5,146.5 38.5,146.5 40.5,146.5 42.5,146.5 44.5,146.5 46.5,146.5 48.5,146.5 50.5,146.5 52.5,146.5 54.5,146.5 56.5,146.5 58.5,146.5 60.5,146.5 62.5,146.5 64.5,146.5 66.5,146.5 68.5,146.5 70.5,146.5 190.5,146.5 192.5,146.5 196.5,146.5 3.5,148.5 5.5,148.5 7.5,148.5 15.5,148.5 17.5,148.5 19.5,148.5 21.5,148.5 23.5,148.5 25.5,148.5 27.5,148.5 29.5,148.5 31.5,148.5 33.5,148.5 35.5,148.5 37.5,148.5 39.5,148.5 41.5,148.5 43.5,148.5 45.5,148.5 47.5,148.5 49.5,148.5 51.5,148.5 53.5,148.5 55.5,148.5 57.5,148.5 59.5,148.5 61.5,148.5 63.5,148.5 65.5,148.5 67.5,148.5 69.5,148.5 71.5,148.5 73.5,148.5 189.5,148.5 191.5,148.5 2.5,150.5 4.5,150.5 6.5,150.5 8.5,150.5 14.5,150.5 16.5,150.5 18.5,150.5 20.5,150.5 22.5,150.5 24.5,150.5 26.5,150.5 28.5,150.5 30.5,150.5 32.5,150.5 34.5,150.5 36.5,150.5 38.5,150.5 40.5,150.5 42.5,150.5 44.5,150.5 46.5,150.5 48.5,150.5 50.5,150.5 52.5,150.5 54.5,150.5 56.5,150.5 58.5,150.5 60.5,150.5 62.5,150.5 64.5,150.5 66.5,150.5 68.5,150.5 70.5,150.5 72.5,150.5 74.5,150.5 188.5,150.5 190.5,150.5 196.5,150.5 3.5,152.5 5.5,152.5 7.5,152.5 9.5,152.5 11.5,152.5 13.5,152.5 15.5,152.5 17.5,152.5 19.5,152.5 21.5,152.5 23.5,152.5 25.5,152.5 27.5,152.5 29.5,152.5 31.5,152.5 33.5,152.5 35.5,152.5 37.5,152.5 39.5,152.5 41.5,152.5 43.5,152.5 45.5,152.5 47.5,152.5 49.5,152.5 51.5,152.5 53.5,152.5 55.5,152.5 57.5,152.5 59.5,152.5 61.5,152.5 63.5,152.5 65.5,152.5 67.5,152.5 69.5,152.5 71.5,152.5 73.5,152.5 75.5,152.5 77.5,152.5 189.5,152.5 191.5,152.5 193.5,152.5 195.5,152.5 2.5,154.5 4.5,154.5 6.5,154.5 14.5,154.5 16.5,154.5 18.5,154.5 20.5,154.5 22.5,154.5 24.5,154.5 26.5,154.5 28.5,154.5 30.5,154.5 32.5,154.5 34.5,154.5 36.5,154.5 38.5,154.5 40.5,154.5 42.5,154.5 44.5,154.5 46.5,154.5 48.5,154.5 50.5,154.5 52.5,154.5 54.5,154.5 56.5,154.5 58.5,154.5 60.5,154.5 62.5,154.5 64.5,154.5 66.5,154.5 68.5,154.5 70.5,154.5 72.5,154.5 74.5,154.5 76.5,154.5 78.5,154.5 188.5,154.5 190.5,154.5 192.5,154.5 194.5,154.5 196.5,154.5 3.5,156.5 5.5,156.5 15.5,156.5 17.5,156.5 19.5,156.5 21.5,156.5 23.5,156.5 25.5,156.5 27.5,156.5 29.5,156.5 31.5,156.5 33.5,156.5 35.5,156.5 37.5,156.5 39.5,156.5 41.5,156.5 43.5,156.5 45.5,156.5 47.5,156.5 49.5,156.5 51.5,156.5 53.5,156.5 55.5,156.5 57.5,156.5 59.5,156.5 61.5,156.5 63.5,156.5 65.5,156.5 67.5,156.5 69.5,156.5 71.5,156.5 73.5,156.5 75.5,156.5 77.5,156.5 79.5,156.5 81.5,156.5 187.5,156.5 189.5,156.5 191.5,156.5 193.5,156.5 195.5,156.5 2.5,158.5 4.5,158.5 6.5,158.5 16.5,158.5 18.5,158.5 20.5,158.5 22.5,158.5 24.5,158.5 26.5,158.5 28.5,158.5 30.5,158.5 32.5,158.5 34.5,158.5 36.5,158.5 38.5,158.5 40.5,158.5 42.5,158.5 44.5,158.5 46.5,158.5 48.5,158.5 50.5,158.5 52.5,158.5 54.5,158.5 56.5,158.5 58.5,158.5 60.5,158.5 62.5,158.5 64.5,158.5 66.5,158.5 68.5,158.5 70.5,158.5 72.5,158.5 74.5,158.5 76.5,158.5 78.5,158.5 80.5,158.5 82.5,158.5 184.5,158.5 186.5,158.5 188.5,158.5 190.5,158.5 192.5,158.5 194.5,158.5 196.5,158.5 3.5,160.5 5.5,160.5 15.5,160.5 17.5,160.5 19.5,160.5 21.5,160.5 23.5,160.5 25.5,160.5 27.5,160.5 29.5,160.5 31.5,160.5 33.5,160.5 35.5,160.5 37.5,160.5 39.5,160.5 41.5,160.5 43.5,160.5 45.5,160.5 47.5,160.5 49.5,160.5 51.5,160.5 53.5,160.5 55.5,160.5 57.5,160.5 59.5,160.5 61.5,160.5 63.5,160.5 65.5,160.5 67.5,160.5 69.5,160.5 71.5,160.5 73.5,160.5 75.5,160.5 77.5,160.5 79.5,160.5 81.5,160.5 83.5,160.5 85.5,160.5 183.5,160.5 185.5,160.5 187.5,160.5 189.5,160.5 191.5,160.5 193.5,160.5 195.5,160.5 2.5,162.5 4.5,162.5 6.5,162.5 8.5,162.5 12.5,162.5 14.5,162.5 16.5,162.5 18.5,162.5 20.5,162.5 22.5,162.5 24.5,162.5 26.5,162.5 28.5,162.5 30.5,162.5 32.5,162.5 34.5,162.5 36.5,162.5 38.5,162.5 40.5,162.5 42.5,162.5 44.5,162.5 46.5,162.5 48.5,162.5 50.5,162.5 52.5,162.5 54.5,162.5 56.5,162.5 58.5,162.5 60.5,162.5 62.5,162.5 64.5,162.5 66.5,162.5 68.5,162.5 70.5,162.5 72.5,162.5 74.5,162.5 76.5,162.5 78.5,162.5 80.5,162.5 82.5,162.5 84.5,162.5 86.5,162.5 88.5,162.5 90.5,162.5 92.5,162.5 94.5,162.5 96.5,162.5 98.5,162.5 100.5,162.5 102.5,162.5 104.5,162.5 106.5,162.5 108.5,162.5 110.5,162.5 112.5,162.5 114.5,162.5 116.5,162.5 118.5,162.5 120.5,162.5 122.5,162.5 124.5,162.5 126.5,162.5 128.5,162.5 130.5,162.5 132.5,162.5 134.5,162.5 136.5,162.5 138.5,162.5 140.5,162.5 142.5,162.5 144.5,162.5 146.5,162.5 148.5,162.5 150.5,162.5 152.5,162.5 154.5,162.5 156.5,162.5 158.5,162.5 160.5,162.5 162.5,162.5 164.5,162.5 166.5,162.5 168.5,162.5 170.5,162.5 172.5,162.5 174.5,162.5 176.5,162.5 178.5,162.5 180.5,162.5 182.5,162.5 184.5,162.5 186.5,162.5 188.5,162.5 190.5,162.5 192.5,162.5 194.5,162.5 196.5,162.5 3.5,164.5 5.5,164.5 7.5,164.5 9.5,164.5 11.5,164.5 13.5,164.5 15.5,164.5 17.5,164.5 19.5,164.5 21.5,164.5 23.5,164.5 25.5,164.5 27.5,164.5 29.5,164.5 31.5,164.5 33.5,164.5 35.5,164.5 37.5,164.5 39.5,164.5 41.5,164.5 43.5,164.5 45.5,164.5 47.5,164.5 49.5,164.5 51.5,164.5 53.5,164.5 55.5,164.5 57.5,164.5 59.5,164.5 61.5,164.5 63.5,164.5 65.5,164.5 67.5,164.5 69.5,164.5 71.5,164.5 73.5,164.5 75.5,164.5 77.5,164.5 79.5,164.5 81.5,164.5 83.5,164.5 85.5,164.5 87.5,164.5 89.5,164.5 91.5,164.5 93.5,164.5 95.5,164.5 97.5,164.5 99.5,164.5 101.5,164.5 103.5,164.5 105.5,164.5 107.5,164.5 109.5,164.5 111.5,164.5 113.5,164.5 115.5,164.5 117.5,164.5 119.5,164.5 121.5,164.5 123.5,164.5 125.5,164.5 127.5,164.5 129.5,164.5 131.5,164.5 133.5,164.5 135.5,164.5 137.5,164.5 139.5,164.5 141.5,164.5 143.5,164.5 145.5,164.5 147.5,164.5 149.5,164.5 151.5,164.5 153.5,164.5 155.5,164.5 157.5,164.5 159.5,164.5 161.5,164.5 163.5,164.5 165.5,164.5 167.5,164.5 169.5,164.5 171.5,164.5 173.5,164.5 175.5,164.5 177.5,164.5 179.5,164.5 181.5,164.5 183.5,164.5 185.5,164.5 187.5,164.5 189.5,164.5 191.5,164.5 193.5,164.5 195.5,164.5 2.5,166.5 4.5,166.5 6.5,166.5 8.5,166.5 10.5,166.5 12.5,166.5 14.5,166.5 16.5,166.5 18.5,166.5 20.5,166.5 22.5,166.5 24.5,166.5 26.5,166.5 28.5,166.5 30.5,166.5 32.5,166.5 34.5,166.5 36.5,166.5 38.5,166.5 40.5,166.5 42.5,166.5 44.5,166.5 46.5,166.5 48.5,166.5 50.5,166.5 52.5,166.5 54.5,166.5 56.5,166.5 58.5,166.5 60.5,166.5 62.5,166.5 64.5,166.5 66.5,166.5 68.5,166.5 70.5,166.5 72.5,166.5 74.5,166.5 76.5,166.5 78.5,166.5 80.5,166.5 82.5,166.5 84.5,166.5 86.5,166.5 88.5,166.5 90.5,166.5 92.5,166.5 94.5,166.5 96.5,166.5 98.5,166.5 100.5,166.5 102.5,166.5 104.5,166.5 106.5,166.5 108.5,166.5 110.5,166.5 112.5,166.5 114.5,166.5 116.5,166.5 118.5,166.5 120.5,166.5 122.5,166.5 124.5,166.5 126.5,166.5 128.5,166.5 130.5,166.5 132.5,166.5 134.5,166.5 136.5,166.5 138.5,166.5 140.5,166.5 142.5,166.5 144.5,166.5 146.5,166.5 148.5,166.5 150.5,166.5 152.5,166.5 154.5,166.5 156.5,166.5 158.5,166.5 160.5,166.5 162.5,166.5 164.5,166.5 166.5,166.5 168.5,166.5 170.5,166.5 172.5,166.5 174.5,166.5 176.5,166.5 178.5,166.5 180.5,166.5 182.5,166.5 184.5,166.5 186.5,166.5 188.5,166.5 190.5,166.5 192.5,166.5 194.5,166.5 3.5,168.5 5.5,168.5 7.5,168.5 9.5,168.5 11.5,168.5 13.5,168.5 15.5,168.5 17.5,168.5 19.5,168.5 21.5,168.5 23.5,168.5 25.5,168.5 27.5,168.5 29.5,168.5 31.5,168.5 33.5,168.5 35.5,168.5 37.5,168.5 39.5,168.5 41.5,168.5 43.5,168.5 45.5,168.5 47.5,168.5 49.5,168.5 51.5,168.5 53.5,168.5 55.5,168.5 57.5,168.5 59.5,168.5 61.5,168.5 63.5,168.5 65.5,168.5 67.5,168.5 69.5,168.5 71.5,168.5 73.5,168.5 75.5,168.5 77.5,168.5 79.5,168.5 81.5,168.5 83.5,168.5 85.5,168.5 87.5,168.5 89.5,168.5 91.5,168.5 93.5,168.5 95.5,168.5 97.5,168.5 99.5,168.5 101.5,168.5 103.5,168.5 105.5,168.5 107.5,168.5 109.5,168.5 111.5,168.5 113.5,168.5 115.5,168.5 117.5,168.5 119.5,168.5 121.5,168.5 123.5,168.5 125.5,168.5 127.5,168.5 129.5,168.5 131.5,168.5 133.5,168.5 135.5,168.5 137.5,168.5 139.5,168.5 141.5,168.5 143.5,168.5 145.5,168.5 147.5,168.5 149.5,168.5 151.5,168.5 153.5,168.5 155.5,168.5 157.5,168.5 159.5,168.5 161.5,168.5 163.5,168.5 165.5,168.5 167.5,168.5 169.5,168.5 171.5,168.5 173.5,168.5 175.5,168.5 177.5,168.5 179.5,168.5 181.5,168.5 183.5,168.5 185.5,168.5 187.5,168.5 189.5,168.5 191.5,168.5 193.5,168.5
NetC6_2: C6.2 DA2.63 R52.2 SA1.2 | length 69
  Top w0.2: SA1.2@55.12,96.5 58.491,96.5 59.191,95.8 96.4,95.8 101.2,100.6 101.7,100.6 103.2,102.1 R52.2@103.2,102.3 110.941,102.3 111.791,103.15 111.8,103.15 112.2,103.55 C6.2@112.2,103.559 ; C6.2@111.75,105 111.8,105 112.2,104.6 C6.2@112.2,104.075 C6.2@112.2,103.792
  Top w0.254: C6.2@112.2,103.792 112.2,103.55 112.573,103.177 112.626,103.177 114.253,101.55 DA2.63@117.95,101.55
NetC7_2: C7.2 DA2.64 R53.2 SA1.4 | length 66.2
  Top w0.2: SA1.4@55.12,93.96 56.635,95.475 99.725,95.475 102.975,98.725 102.975,98.95 R53.2@103.175,99.15 103.225,99.2 111.25,99.2 111.8,99.75 111.8,100.3 C7.2@112.2,100.7
  Top w0.254: C7.2@112.2,100.7 112.35,100.55 DA2.64@118,100.55
NetC8_1: C8.1 DA2.11 ZQ1.2 | length 15.3
  Top w0.2: C8.1@119.2,75.6 119.2,80.225 119.525,80.225 123.65,84.35 DA2.11@123.65,88.9
NetC9_1: C9.1 DA2.12 ZQ1.1 | length 13.6
  Top w0.2: C9.1@123.843,75.684 124.1,75.94 ZQ1.1@124.1,79.9 124.1,83.75 124.7,84.35 124.7,88.85 DA2.12@124.65,88.9
NetC15_1: C15.1 DA2.10 R57.2 X5.15 | length 50.3
  Top w0.2: DA2.10@122.65,88.9 122.65,85.55 122.1,85 121,85 118,82 118,78.1 116.9,77 116.9,74.2 124.7,66.4 C15.1@134.025,66.4 ; C15.1@134.075,66.375 135.525,66.375 R57.2@137.575,64.325 ; X5.15@137.72,57.3 137.72,60.63 136.9,61.45 136.9,63.7 137.325,64.125 137.375,64.125 R57.2@137.575,64.325 ; R57.2@137.775,64.325 R57.2@137.575,64.325
NetC16_1: C16.1 DD1.28 | length 5.8
  Top w0.2: C16.1@98.3,41.5 98.3,40.71 99.84,39.17 DD1.28@99.84,36.35
NetC17_2: C17.2 DD1.4 | length 5.9
  Top w0.4: 90.14,32.66 DD1.4@93.15,32.66
  Top w0.5: C17.2@89.025,35.1 89.025,33.775 90.14,32.66
NetC18_1: C18.1 DD1.1 | length 10.4
  Top w0.2: C18.1@95,44.9 95.525,44.9 96.475,43.95 96.475,40.99 98.825,38.64 DD1.1@98.825,36.35
NetC18_2: C18.2 DD1.3 | length 5.9
  Top w0.2: C18.2@95,41.5 95.083,41.417 95.083,40.382 96.84,38.625 DD1.3@96.84,36.35
NetC20_1: C20.1 DD1.27 | length 9.7
  Top w0.2: DD1.27@100.84,36.35 100.84,40.235 100.15,40.925 100.15,43.966 100.675,44.491 100.675,44.5 101.075,44.9 C20.1@101.6,44.9
NetC20_2: C20.2 DD1.25 | length 5.7
  Top w0.2: C20.2@101.6,41.5 101.6,40.5 102.84,39.26 DD1.25@102.84,36.35
NetDA2_14: DA2.14 R23.2 VD1.2 | length 75.4
  Top w0.2: R23.2@62.78,83 66.95,83 69.6,85.65 VD1.2@70.025,86.075 ; VD1.2@70.05,86.05 79.123,95.123 96.377,95.123 102.15,89.35 118.175,89.35 121.075,92.25 125.95,92.25 126.617,91.583 126.617,88.933 DA2.14@126.65,88.9
NetDA2_21: DA2.21 R50.1 | length 7
  Top w0.2: DA2.21@133.65,88.9 133.65,85.55 135.817,83.383 135.817,82.883 R50.1@135.9,82.8
NetDA2_22: DA2.22 R62.2 X5.13 | length 35.2
  Top w0.2: DA2.22@134.6,88.9 134.6,85.5 134.625,85.475 137.1,83 137.1,66.275 v1(139.025,64.35) 139.05,64.325 R62.2@140.3,64.325
  Bottom w0.2: v1(139.025,64.35) 139.025,61.975 140.26,60.74 X5.13@140.26,57.3
NetDA2_23: DA2.23 R58.2 X5.7 | length 40.8
  Top w0.2: DA2.23@135.6,88.9 135.6,85.475 137.675,83.4 137.675,69.325 143.4,63.6 145.9,63.6 v1(146.625,64.325) R58.2@147.825,64.325
  Bottom w0.2: v1(146.625,64.325) 146.625,61.95 147.88,60.695 X5.7@147.88,57.3
NetDA2_24: DA2.24 R59.2 X5.9 | length 36.6
  Top w0.2: DA2.24@136.6,88.9 136.6,85.45 138.2,83.85 138.2,70.1 v1(143.975,64.325) R59.2@145.375,64.325
  Bottom w0.2: v1(143.975,64.325) 143.975,61.95 145.34,60.585 X5.9@145.34,57.3
NetDA2_25: DA2.25 R60.2 X5.3 | length 43.4
  Top w0.2: DA2.25@140.3,92.55 143.05,92.55 148.4,87.2 v1(148.4,82.1) ; v1(148.3,79.2) 148.3,77.8 151.7,74.4 v1(151.7,64.325) 151.725,64.3 R60.2@152.925,64.3
  Bottom w0.2: v1(148.3,79.2) 148.396,79.296 148.396,79.563 148.4,79.567 v1(148.4,82.1) ; v1(151.7,64.325) 151.7,61.925 152.96,60.665 X5.3@152.96,57.3
NetDA2_26: DA2.26 R61.2 X5.5 | length 50.7
  Top w0.2: DA2.26@140.3,93.55 143.05,93.55 149.6,87 v1(149.6,80.9) ; v1(149.4,78.2) 153.7,73.9 153.7,63.957 153.443,63.7 149.75,63.7 v1(149.15,64.3) R61.2@150.45,64.3
  Bottom w0.2: v1@149.15,64.35 v1(149.15,64.3) 149.15,61.925 150.42,60.655 X5.5@150.42,57.3 ; v1(149.4,78.2) 149.496,78.296 149.496,78.563 149.5,78.567 149.5,80.533 149.504,80.537 149.504,80.804 v1(149.6,80.9)
NetDA2_27: DA2.27 R48.1 | length 11.8
  Top w0.2: DA2.27@140.25,94.55 145.1,94.55 149.925,89.725 R48.1@149.925,89.55
NetDA2_28: DA2.28 R49.1 | length 10.4
  Top w0.2: DA2.28@140.25,95.55 143.3,95.55 143.8,95.05 149.15,95.05 149.9,94.3 R49.1@149.9,94.1
NetDA2_31: DA2.31 R36.2 R43.1 VD5.2 | length 18.7
  Top w0.2: DA2.31@140.3,98.55 140.35,98.5 154,98.5 R43.1@154.1,98.4 ; R43.1@154,98.45 R36.2@155.65,98.45 ; R36.2@155.9,98.4 156.1,98.4 156.7,97.8 VD5.2@158.8,97.8
NetDA2_33: DA2.33 R35.2 R42.1 VD4.2 | length 19.1
  Top w0.2: DA2.33@140.283,100.517 152.517,100.517 153.7,101.7 153.9,101.9 R42.1@154.1,101.9 R35.2@155.9,101.9 VD4.2@158.8,101.9